# EAGLE board Motor_Controller (EAGLE 6.5.0)
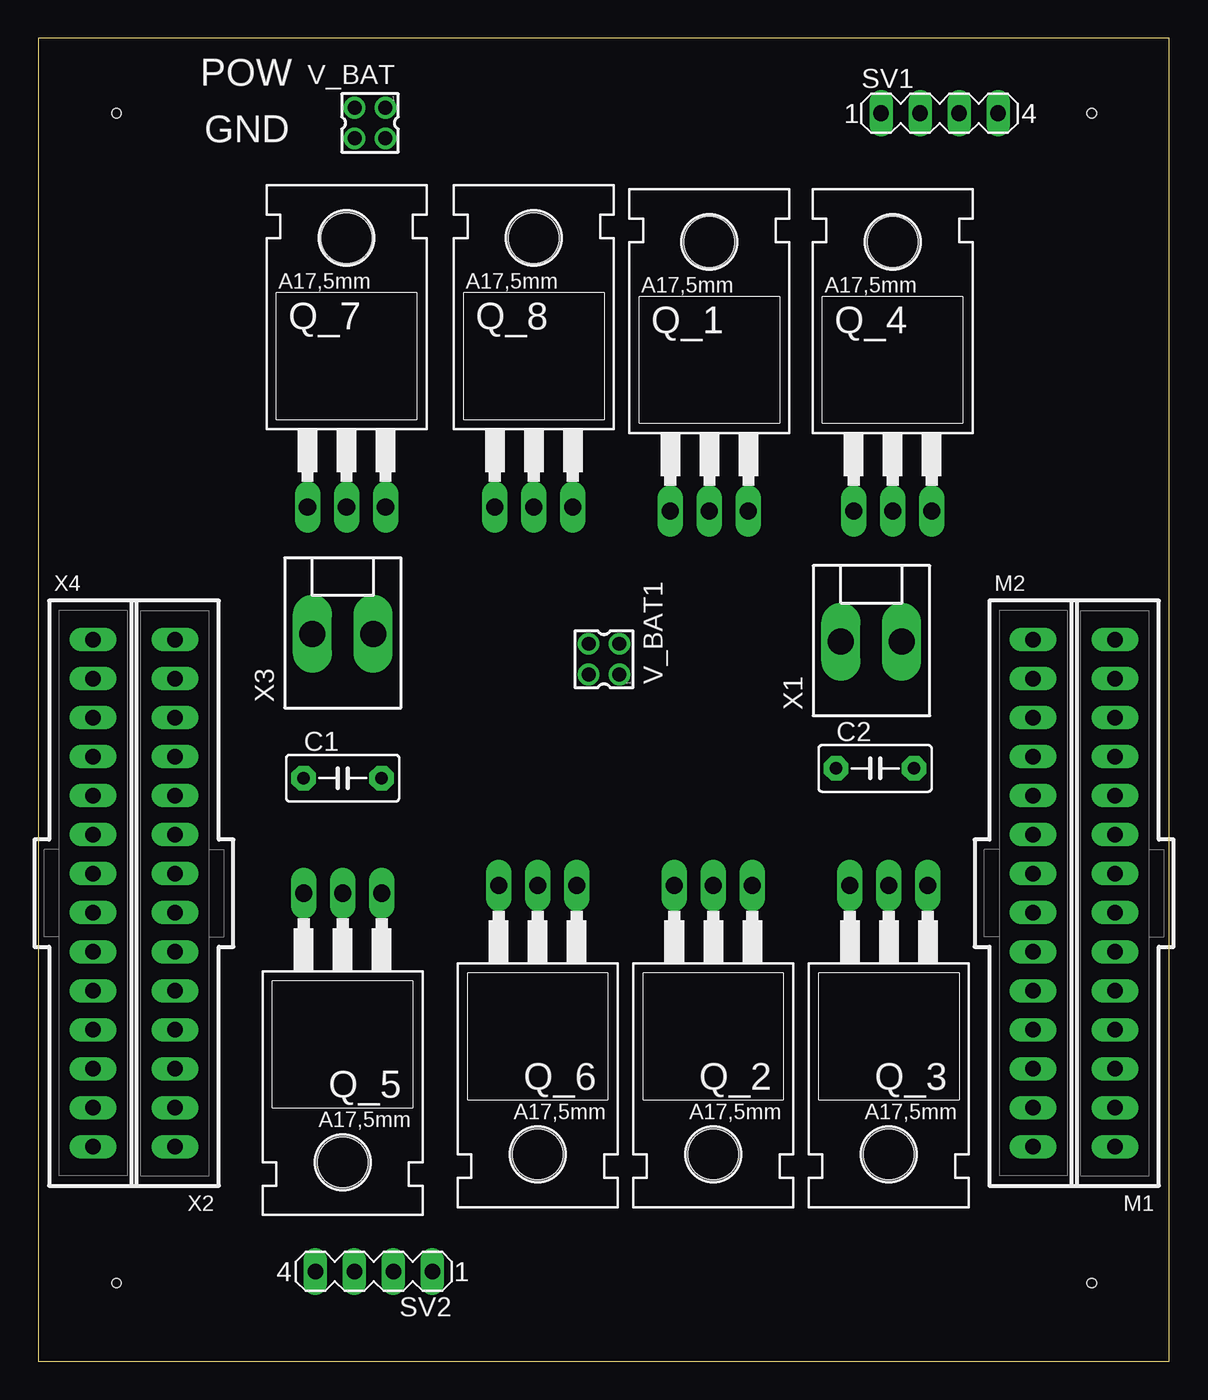
[diagram p0: board, top side]
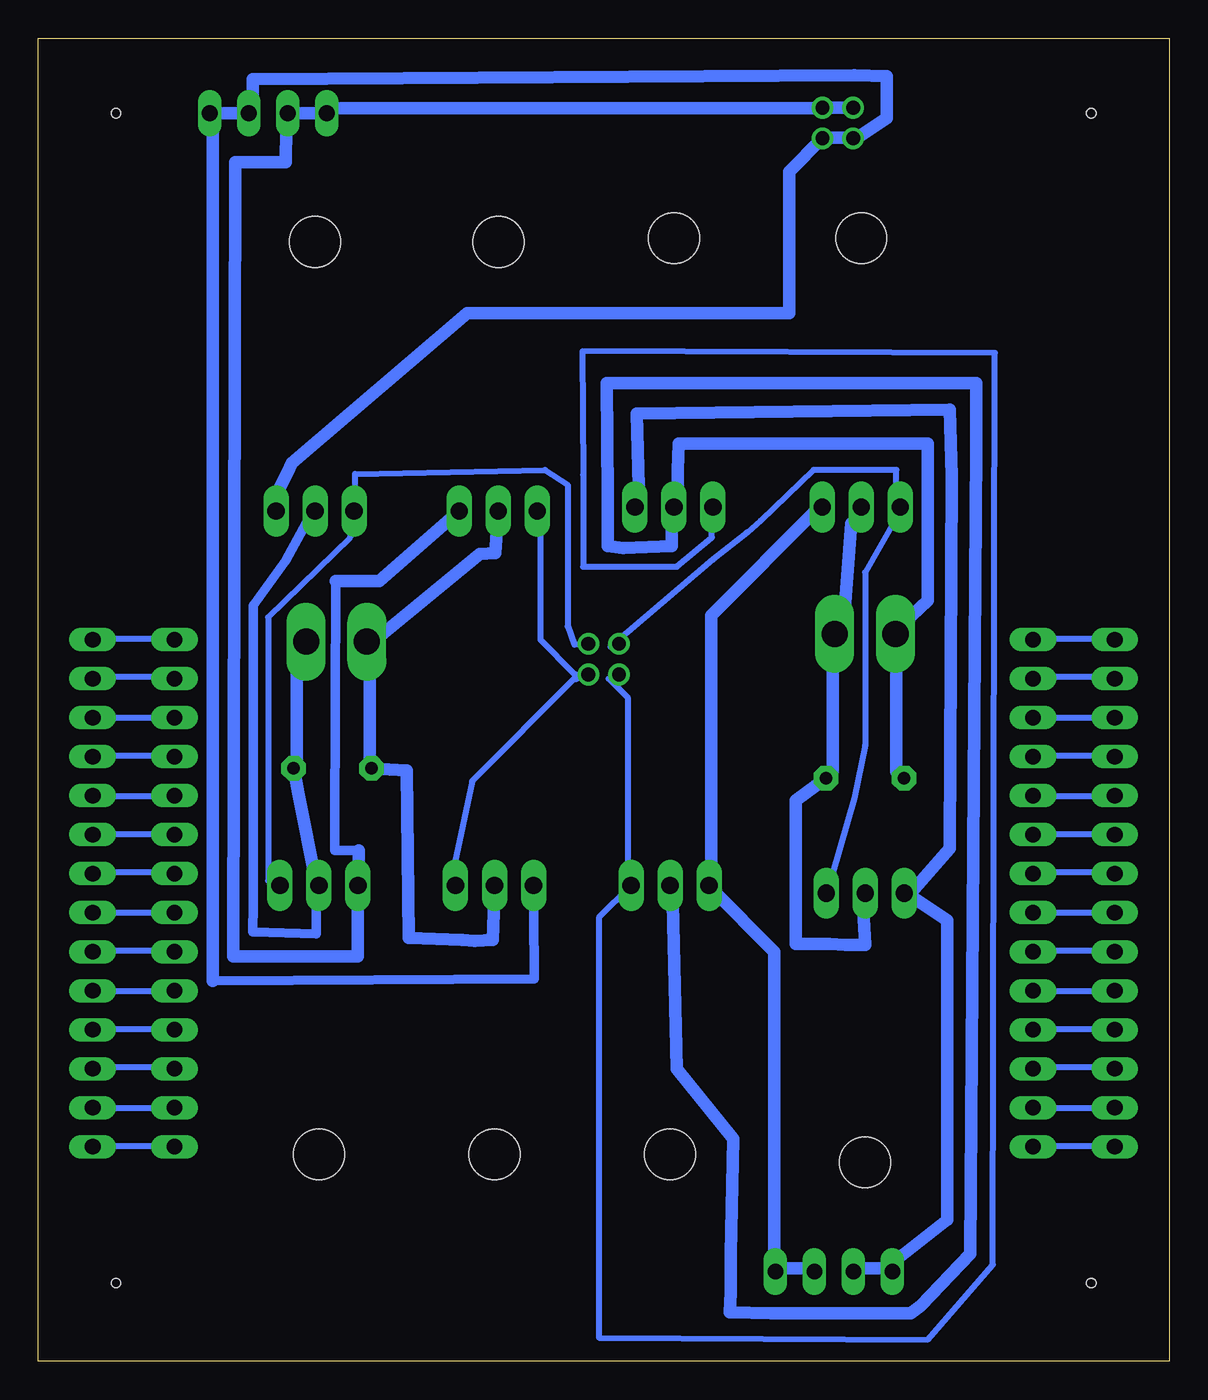
[diagram p1: board, bottom side, seen from below]

Size 73.64 x 86.16 mm. Coordinates in mm from the lower left corner, seen from the top.
Outline: 0,0 73.64,0 73.64,86.16 0,86.16 0,0
Copper layers (1*16): Top 0.035mm / dielectric 1.5mm / Bottom 0.035mm
Design rules "default": minimum track width 10mil, minimum drill 24mil, track to track 8mil, track to pad 8mil, pad to pad 8mil, via to via 8mil, smd to smd 8mil, copper to edge 40mil, drill to drill 8mil, minimum pad ring 10mil, minimum via ring 8mil, stop-mask expansion 4mil, vias tented up to drill 0mil, thermal gap 10mil
Net classes: 0 default: width 0.406 mm, clearance 0.254 mm; 1 POWER: width 0.61 mm, clearance 0.254 mm
Holes 0.6 mm at 5.08,5.08 68.58,5.08 5.08,81.28 68.58,81.28

## Footprints (pad centres in the part's own frame; a part is rotated, then mirrored left to right if it is on the bottom)
C5B3 = drill 0.813 pad 1.6 octagon: 1 -2.54,0; 2 2.54,0
70543-14 = drill 1.016 long: 1 -16.51,0; 2 -13.97,0; 3 -11.43,0; 4 -8.89,0; 5 -6.35,0; 6 -3.81,0; 7 -1.27,0; 8 1.27,0; 9 3.81,0; 10 6.35,0; 11 8.89,0; 12 11.43,0; 13 13.97,0; 14 16.51,0
TO220BH = drill 1.118 long: D 0,-6.35; G -2.54,-6.35; S 2.54,-6.35 | hole 3.302: 0,11.176
MA04-1 = drill 1.016 long: 1 -3.81,0; 2 -1.27,0; 3 1.27,0; 4 3.81,0
87758-0416 = drill 0.9 pad 1.27: 1 -1,-1; 2 -1,1; 3 1,-1; 4 1,1
KK-156-2 = drill 1.7 pad 2.184 long: 1 -1.98,0; 2 1.98,0

## Placement (x,y rotation side)
C1  [C5B3]  19.81,37.97 0 top
C2  [C5B3]  54.48,38.61 0 top
M1  C-GRID-14-70543  [70543-14]  70.1,30.48 90 top
M2  C-GRID-14-70543  [70543-14]  64.77,30.48 270 top
Q_1  IRF4905  [TO220BH]  43.69,61.72 0 top
Q_2  IRFZ48Z  [TO220BH]  43.94,24.64 180 top
Q_3  IRF4905  [TO220BH]  55.37,24.64 180 top
Q_4  IRFZ48Z  [TO220BH]  55.63,61.72 0 top
Q_5  IRFZ48Z  [TO220BH]  19.81,24.13 180 top
Q_6  IRF4905  [TO220BH]  32.51,24.64 180 top
Q_7  IRF4905  [TO220BH]  20.07,61.98 0 top
Q_8  IRFZ48Z  [TO220BH]  32.26,61.98 0 top
SV1  [MA04-1]  58.67,81.28 0 top
SV2  [MA04-1]  21.84,5.84 180 top
V_BAT  87758-0416  [87758-0416]  21.59,80.64 180 top
V_BAT1  87758-0416  [87758-0416]  36.83,45.72 90 top
X1  [KK-156-2]  54.23,46.86 0 top
X2  C-GRID-14-70543  [70543-14]  8.89,30.48 90 top
X3  [KK-156-2]  19.81,47.37 0 top
X4  C-GRID-14-70543  [70543-14]  3.56,30.48 270 top

## Library data of the parts
C1 C2 = capacitor-wima
M1 M2 X1-X4 = con-molex; OC_FARNELL: unknown; OC_NEWARK: unknown
Q_1-Q_8 = transistor-power
SV1 SV2 = con-lstb; OC_FARNELL: unknown; OC_NEWARK: unknown
V_BAT V_BAT1 = con-molex; MF: FARNELL; MPN: 87758-0416; OC_FARNELL: 7472315; OC_NEWARK: 39K3681

## Nets
GND1 [POWER]: Q_2.S Q_4.S SV1.3 SV1.4 V_BAT.2 V_BAT.4
GND2 [POWER]: Q_5.S Q_8.S SV2.3 SV2.4
ML+ [POWER]: C1.1 Q_6.D Q_8.D X3.1
ML- [POWER]: C1.2 Q_5.D Q_7.D X3.2
ML_G+: Q_6.G Q_8.G V_BAT1.2
ML_G-: Q_5.G Q_7.G V_BAT1.4
MR+ [POWER]: C2.1 Q_1.D Q_2.D X1.1
MR- [POWER]: C2.2 Q_3.D Q_4.D X1.2
MR_G+: Q_1.G Q_2.G V_BAT1.1
MR_G-: Q_3.G Q_4.G V_BAT1.3
N$8: M1.1 M2.14
N$9: M1.2 M2.13
N$10: M1.3 M2.12
N$11: M1.4 M2.11
N$14: M1.5 M2.10
N$15: M1.6 M2.9
N$16: M1.7 M2.8
N$18: M1.8 M2.7
N$19: M1.9 M2.6
N$20: M1.10 M2.5
N$21: M1.11 M2.4
N$22: M1.12 M2.3
N$23: M1.13 M2.2
N$24: M1.14 M2.1
N$25: X2.1 X4.14
N$26: X2.2 X4.13
N$27: X2.3 X4.12
N$28: X2.4 X4.11
N$29: X2.5 X4.10
N$30: X2.6 X4.9
N$31: X2.7 X4.8
N$32: X2.8 X4.7
N$33: X2.9 X4.6
N$34: X2.10 X4.5
N$35: X2.11 X4.4
N$36: X2.12 X4.3
N$37: X2.13 X4.2
N$38: X2.14 X4.1
POW1 [POWER]: Q_1.S Q_3.S SV1.1 SV1.2 V_BAT.1 V_BAT.3
POW2 [POWER]: Q_6.S Q_7.S SV2.1 SV2.2

## Tracks (layer width: path | path; a pad name or v marks a point on that pad's centre or on a via)
GND1
  Bottom 0.61: 20.64,79.69 V_BAT.4 20.32,79.69 | 22.54,79.69 V_BAT.2 | Q_2.S 41.4,29.27 41.34,24.89 62.29,24.77 | 62.29,81.28 SV1.4 | 59.69,81.28 SV1.3
  Bottom 0.813: 22.54,79.69 20.64,79.69 | V_BAT.2 24.77,77.47 24.77,68.26 45.72,68.26 57.15,58.48 57.4,57.91 58.1,56.58 Q_4.S | SV1.3 62.29,81.28 62.29,24.77 | 20.32,79.69 18.41,80.96 18.41,83.69 20.51,83.76 59.69,83.5 59.69,81.28
GND2
  Bottom 0.61: 18.1,6.03 SV2.4 18.1,6.35 | 20.32,6.03 SV2.3 | 34.61,55.88 Q_8.S | 16.83,30.48 17.14,30.48 Q_5.S
  Bottom 0.813: 20.32,6.03 18.1,6.03 | 17.14,30.48 14.48,28.7 14.48,9.21 18.1,6.35 | 34.61,55.88 34.54,56.96 34.67,61.72 14.29,61.98 14.16,57.66 14.29,33.4 16.83,30.48
ML+
  Bottom 0.61: 17.78,38.42 17.46,38.1 | 17.78,47.31 X3.1 17.78,47.62 | 32.07,55.88 Q_8.D 32.38,55.56 | 32.32,29.84 32.38,30.8 Q_6.D
  Bottom 0.813: 17.78,47.31 17.78,38.42 | 17.46,38.1 C1.1 | 32.07,55.88 32,57.34 32,58.04 31.94,59.75 15.75,59.75 15.75,49.53 17.78,47.62 | 32.32,29.84 32.07,19.05 28.38,14.48 28.57,6.99 28.57,4.45 28.64,3.17 25.91,3.11 16.83,3.11 16.19,3.62 12.95,6.99 12.57,59.5 12.57,63.69 36.64,63.69 36.58,56.39 36.58,53.09 35.56,52.96 32.38,53.09 32.38,55.56
ML-
  Bottom 0.61: 21.91,38.42 C1.2 | 21.91,47.31 X3.2 21.59,47.62 | 20.7,54.55 20.32,55.56 Q_7.D
  Bottom 0.813: 21.91,47.31 21.91,38.42 | C1.2 24.32,36.51 24.32,27.18 22.16,27.18 21.08,27.11 19.81,27.11 20,30.48 Q_5.D | 20.7,54.55 21.21,48.13 21.59,47.62
ML_G+
  Bottom 0.406: V_BAT1.2 36.51,44.45 35.24,43.18 35.24,31.11 Q_6.G 37.15,28.89 37.15,1.52 15.75,1.4 11.49,6.29 11.37,65.66 38.23,65.79 38.16,57.72 38.16,51.75 32.07,51.75 29.78,53.66 29.78,55.24 29.84,55.56 Q_8.G
ML_G-
  Bottom 0.406: V_BAT1.4 36.39,46.55 29.72,52.2 27.5,53.98 26.61,54.74 23.18,58.04 17.78,58.04 17.78,55.88 Q_7.G 17.78,55.56 17.78,54.93 19.81,51.37 19.81,40.13 20.51,36.64 21.91,31.81 22.23,30.48 Q_5.G
MR+
  Bottom 0.61: 52.07,38.73 C2.1
  Bottom 0.813: 52.07,46.67 52.07,38.73 | Q_1.D 43.88,52.64 44.9,52.58 52.07,46.67 | 52.07,46.67 X1.1 | Q_2.D 44.07,27.43 45.21,27.37 46.04,27.43 49.53,27.56 49.66,38.48 C2.1
MR-
  Bottom 0.61: 55.56,31.11 Q_3.D 55.56,30.8 55.56,27.81 59.69,27.94 59.65,29.73 59.65,49.23 57.53,52.13 56.39,54.23 55.88,55.24 Q_4.D | 56.83,46.35 56.52,46.67 | 56.83,38.73 C2.2
  Bottom 0.813: C2.2 56.71,37.02 55.56,31.11 | 56.83,38.73 56.83,46.35 | 56.52,46.67 X1.2
MR_G+
  Bottom 0.254: 38.63,44.35 V_BAT1.1
  Bottom 0.406: Q_1.G 40.96,55.24 40.96,46.99 38.73,44.77 V_BAT1.1 38.73,44.45 45.4,37.78 46.55,32.45 Q_2.G
MR_G-
  Bottom 0.406: V_BAT1.3 38.73,46.67 39.18,47.88 39.18,57.09 40.64,58.04 53.02,57.78 53.02,55.56 Q_4.G 53.34,55.24 53.34,53.66 58.67,48.45 58.67,31.3 58.1,31.11 Q_3.G
N$8
  Bottom 0.406: M2.14 64.88,14.03 70,14.03 M1.1
N$9
  Bottom 0.406: M1.2 M2.13
N$10
  Bottom 0.406: M2.12 64.88,19.15 70,19.15 M1.3
N$11
  Bottom 0.406: M2.11 64.88,21.63 70,21.63 M1.4
N$14
  Bottom 0.406: M2.10 64.88,24.11 70,24.11 M1.5
N$15
  Bottom 0.406: M2.9 64.88,26.75 70,26.75 M1.6
N$16
  Bottom 0.406: M2.8 64.88,29.22 70,29.22 M1.7
N$18
  Bottom 0.406: M2.7 64.88,31.86 70,31.86 M1.8
N$19
  Bottom 0.406: M2.6 64.88,34.34 70,34.34 M1.9
N$20
  Bottom 0.406: M2.5 64.88,36.82 70,36.82 M1.10
N$21
  Bottom 0.406: M2.4 64.88,39.46 70,39.46 M1.11
N$22
  Bottom 0.406: M2.3 64.88,41.94 70,41.94 M1.12
N$23
  Bottom 0.406: M2.2 64.88,44.58 70,44.58 M1.13
N$24
  Bottom 0.406: M2.1 64.88,47.05 70,47.05 M1.14
N$25
  Bottom 0.406: X4.14 3.63,14.03 8.75,14.03 X2.1
N$26
  Bottom 0.406: X2.2 X4.13
N$27
  Bottom 0.406: X4.12 3.63,19.15 8.75,19.15 X2.3
N$28
  Bottom 0.406: X4.11 3.63,21.63 8.75,21.63 X2.4
N$29
  Bottom 0.406: X4.10 3.63,24.11 8.75,24.11 X2.5
N$30
  Bottom 0.406: X4.9 3.63,26.75 8.75,26.75 X2.6
N$31
  Bottom 0.406: X4.8 3.63,29.22 8.75,29.22 X2.7
N$32
  Bottom 0.406: X4.7 3.63,31.86 8.75,31.86 X2.8
N$33
  Bottom 0.406: X4.6 3.63,34.34 8.75,34.34 X2.9
N$34
  Bottom 0.406: X4.5 3.63,36.82 8.75,36.82 X2.10
N$35
  Bottom 0.406: X4.4 3.63,39.46 8.75,39.46 X2.11
N$36
  Bottom 0.406: X4.3 3.63,41.94 8.75,41.94 X2.12
N$37
  Bottom 0.406: X4.2 3.63,44.58 8.75,44.58 X2.13
N$38
  Bottom 0.406: X4.1 3.63,47.05 8.75,47.05 X2.14
POW1
  Bottom 0.61: 52.77,33.27 54.36,33.27 54.36,34.54 54.29,50.8 | 52.77,31.24 53.02,31.11 Q_3.S | 54.61,81.6 54.61,81.28 SV1.1 | 22.86,81.6 V_BAT.1 | 57.47,80.96 57.47,81.28 SV1.2
  Bottom 0.813: V_BAT.3 V_BAT.1 | Q_1.S 51.44,50.8 54.29,50.8 | 52.77,31.24 52.77,33.27 | SV1.2 SV1.1 | 54.61,81.6 22.86,81.6 | Q_3.S 52.83,26.35 60.96,26.35 60.83,78.11 57.53,78.11 57.53,78.61 57.47,80.96
POW2
  Bottom 0.61: 25.4,6.03 SV2.1 25.72,6.03 | 29.84,30.8 Q_6.S 29.84,31.11 | 22.86,55.56 Q_7.S
  Bottom 0.813: 25.4,6.03 23.18,6.03 SV2.2 | 29.84,30.8 25.72,26.67 25.72,6.03 | 22.86,55.56 29.84,48.58 29.84,31.11

## Text on the board
tNames: POW | GND